# Altium PCB 397881-L.PcbDoc
Units mm, origin at the board's own origin, x right, y up, seen from the top; angles counter-clockwise.
Board outline 90 x 40 mm, 2 copper layers (Top Layer, Bottom Layer); 61 components, 66 nets, 226 pads, 104 vias.
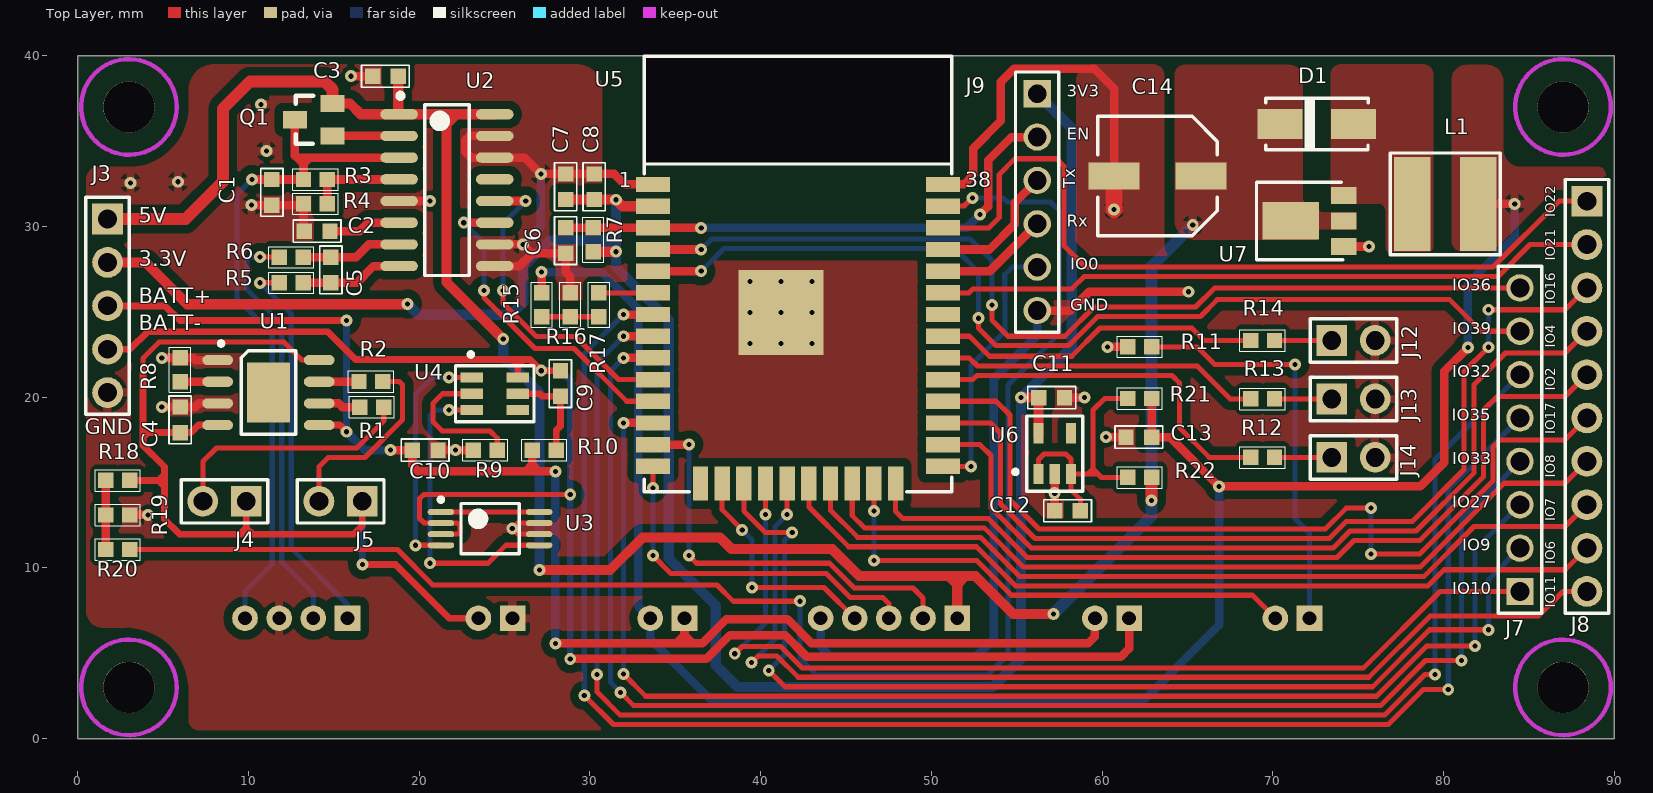
[diagram p0: Top Layer view]
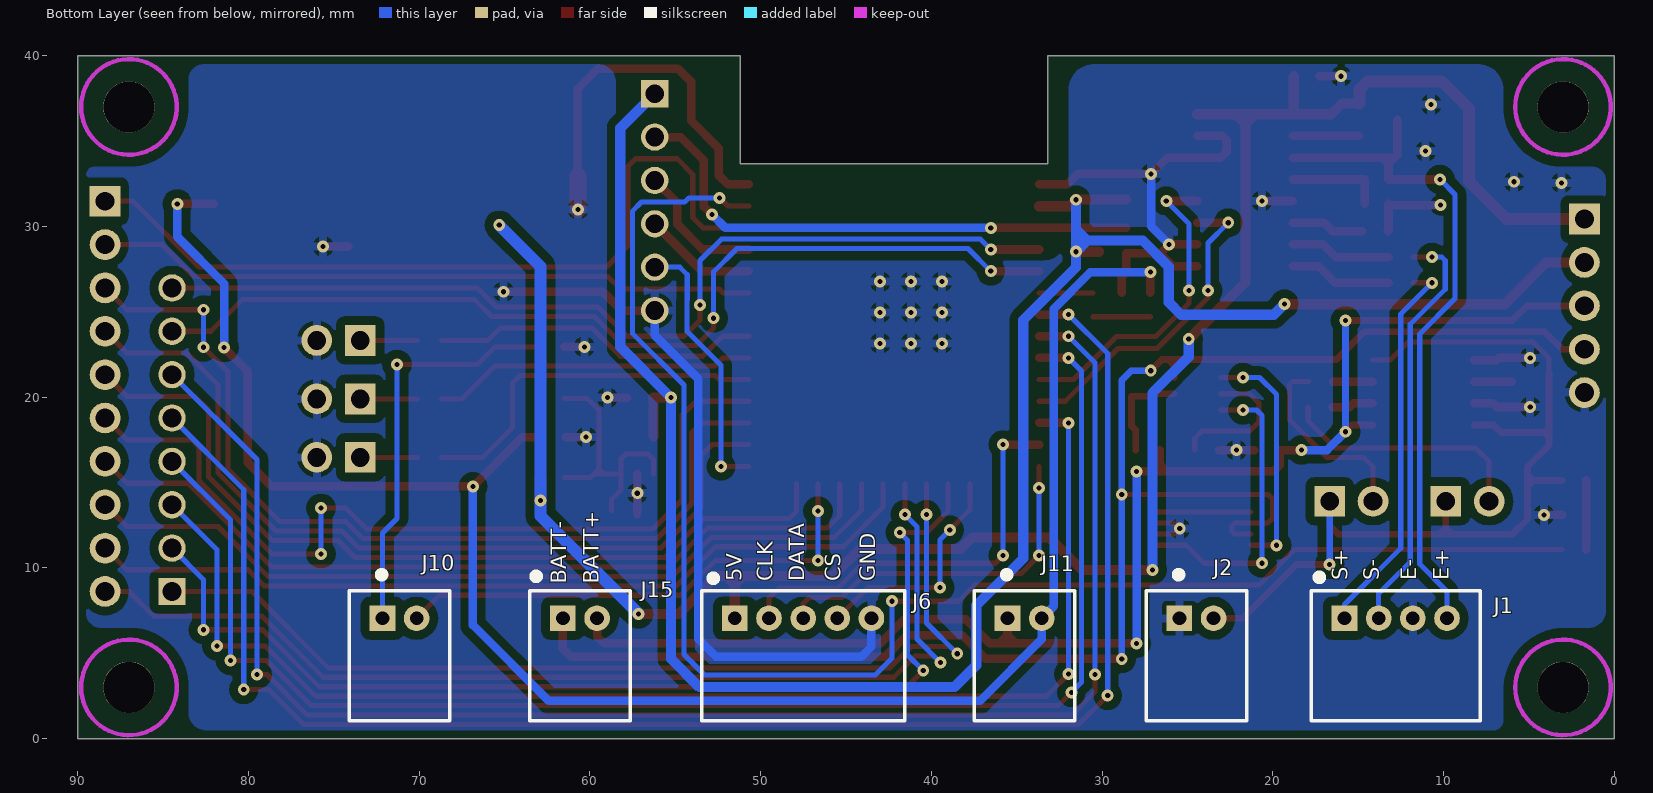
[diagram p1: Bottom Layer view, seen from below]

## Layer stack, top to bottom
Top Solder: solder mask 0.0102, Solder Resist, Dk 3.5
Top Layer: signal copper 0.0356
Dielectric 1: dielectric 0.32, FR-4, Dk 4.8
Bottom Layer: signal copper 0.0356
Bottom Solder: solder mask 0.0102, Solder Resist, Dk 3.5

## Board outline
0,0 0,40 33.19,40 33.19,33.66 51.2,33.66 51.2,40 90,40 90,0

## Design rules (kind name [scope] priority, off if disabled: settings)
Clearance Clearance_1 [All vs InPolygon] p1: gap=0.5 ignorepadtopadclearanceinfootprint=FALSE
Clearance [All] p2: gap=0.254 ignorepadtopadclearanceinfootprint=FALSE
HoleSize [All] p1: absolutevalues=TRUE maxlimit=3 minlimit=0.025 maxpercent=80.000 minpercent=20.000
MinimumSolderMaskSliver [All] p1 off: minsoldermaskwidth=0.254
PolygonConnect [All] p1: thpad.connectstyle=Relief thpad.reliefconductorwidth=0.5 thpad.reliefentries=4 thpad.polygonreliefangle="90 Angle" thpad.airgapwidth=0.254 smdpad.connectstyle=Direct smdpad.reliefconductorwidth=0.254 smdpad.reliefentries=4 smdpad.polygonreliefangle="90 Angle" smdpad.airgapwidth=0.254 via.connectstyle=Relief via.reliefconductorwidth=0.5 via.reliefentries=4 via.polygonreliefangle="90 Angle" via.airgapwidth=0.254
RoutingVias [All] p1: holewidth=0.711 width=1.27 viastyle="Through Hole" minholewidth=0.711 minwidth=1.27 maxholewidth=0.711 maxwidth=1.27
SilkToSolderMaskClearance [IsPad] p1 off: minsilkscreentomaskgap=0.254 clearancetoexposedcopper=TRUE
SolderMaskExpansion [All] p1: expansion=0.102
Width [All] p1: maxlimit=5 minlimit=0.2 preferedwidth=0.3
27 further rules are at their usual default settings.

## Components (designator, comment, footprint, x,y, rotation, side; value= is the part's Value field where it differs from the comment)
C1 "Cap" C0603 11.375,32 r90 top value=10uF
C2 "Cap" C0603 14.025,29.725 r180 top value=0.1uF
C3 "Cap" C0603 18.025,38.8 r0 top value=10uF
C4 "Cap" C0603 5.998,18.675 r270 top value=0.1uF
C5 "Cap" C0603 14.825,27.45 r90 top value=0.1uF
C6 "Cap" C0603 28.575,29.17 r90 top value=1nF
C7 "Cap" C0603 28.575,32.325 r270 top value=0.1uF
C8 "Cap" C0603 30.25,32.325 r270 top value=10uF
C9 "Cap" C0603 28.275,20.8 r270 top value=0.1uF
C10 "Cap" C0603 20.35,16.9 r180 top value=10uF
C11 "Cap" C0603 57.05,19.975 r180 top value=1uF
C12 "Cap" C0603 57.975,13.35 r0 top value=1uF
C13 "Cap" C0603 62.15,17.662 r0 top value=0.1uF
C14 "Cap Pol1" C14 63.25,32.95 r270 top value=100uF
D1 "SS14" D1 72.575,36 r180 top
J1 "Conn_JST_PH4" J1 12.8,7.05 r0 bottom
J2 "Conn_JST_PH" J2,J10,J11,J15 24.47,7.05 r0 bottom
J3 "Conn_01X05_Female_2.54mm" J3 1.75,25.35 r270 top
J4 "LED_Conn_2.54mm" J4,J5,J12,J13,J14 8.6,13.9 r180 top
J5 "LED_Conn_2.54mm" J4,J5,J12,J13,J14 15.4,13.9 r180 top
J6 "Conn_JST_PH" J6 47.51,7.05 r0 bottom
J7 "Conn_01X08_Female_2.54mm" J7 84.475,17.51 r90 top
J8 "Conn_01X10_Female_2.54mm" J8 88.4,20.05 r270 top
J9 "Conn_01X06_Female_2.54mm" J9 56.2,31.425 r270 top
J10 "Conn_JST_PH" J2,J10,J11,J15 71.15,7.05 r0 bottom
J11 "Conn_JST_PH" J2,J10,J11,J15 34.54,7.05 r0 bottom
J12 "LED_Conn_2.54mm" J4,J5,J12,J13,J14 74.725,23.325 r0 top
J13 "LED_Conn_2.54mm" J4,J5,J12,J13,J14 74.725,19.9 r0 top
J14 "LED_Conn_2.54mm" J4,J5,J12,J13,J14 74.725,16.475 r0 top
J15 "Conn_JST_PH" J2,J10,J11,J15 60.58,7.05 r0 bottom
L1 "Inductor Iron" L1 80.1,31.325 r270 top value=47uH
Q1 "S8550" Q1 13.825,36.25 r90 top
R1 "Res1" R0603 17.223,19.419 r0 top value=1K
R2 "Res1" R0603 17.173,20.919 r0 top value=1K
R3 "Res1" R0603 13.925,32.75 r180 top value=20K
R4 "Res1" R0603 13.925,31.325 r0 top value=8.2K
R5 "Res1" R0603 12.5,26.7 r180 top value=100R
R6 "Res1" R0603 12.5,28.2 r180 top value=100R
R7 "Res1" R0603 30.2,29.22 r270 top value=10K
R8 "Res1" R0603 5.998,21.604 r90 top value=1.2K
R9 "Res1" R0603 23.875,16.9 r180 top value=1K
R10 "Res1" R0603 27.325,16.9 r180 top value=100R
R11 "Res1" R0603 62.2,22.95 r0 top value=1K
R12 "Res1" R0603 69.4,16.475 r180 top value=1K
R13 "Res1" R0603 69.4,19.9 r180 top value=1K
R14 "Res1" R0603 69.4,23.32 r180 top value=1K
R15 "Res1" R0603 27.175,25.41 r90 top value=10K
R16 "Res1" R0603 28.85,25.41 r270 top value=20K
R17 "Res1" R0603 30.525,25.41 r270 top value=1K
R18 "Res1" R0603 2.35,15.125 r180 top value=10K
R19 "Res1" R0603 2.35,13.1 r0 top value=20K
R20 "Res1" R0603 2.35,11.075 r180 top value=1K
R21 "Res1" R0603 62.2,19.925 r0 top value=100R
R22 "Res1" R0603 62.2,15.3 r180 top value=100R
U1 "TP4056IC" U1 11.173,20.269 r0 top
U2 "HX711IC" U2 21.625,32.125 r0 top
U3 "FS8205A" U3 24.15,12.3 r0 top
U4 "DW01A" U4 24.425,20.2 r270 top
U5 "ESP-WROOM-32" U5 42.19,23.705 r0 top locked
U6 "AP2112-3.3_LDO" U6 57.225,16.7 r0 top
U7 "BL8530" U7 72.7,30.325 r90 top

## Footprints (in the part's own frame and the unit in brackets; to place one, negate y for a bottom-side part, rotate by r counter-clockwise, add the part's x,y. Pads: shape width x height; smd on the part's side, far side on the other; paste and mask are expansions set on the pad)
C14 [mm]
  rect 1.6x3 smd: 1(0,2.55) 2(0,-2.55)
  silkscreen extent -3.5,-3.5 3.5,3.5, body extent -3.3,-3.6 3.3,3.6, height 5.9
C0603 [mm]
  rect 0.9x0.9 smd: 1(-0.75,0) 2(0.75,0)
  silkscreen extent -1.4,-0.65 1.4,0.65, body extent -0.8,-0.4 0.8,0.4, height 0.3
D1 [mm]
  rect 2.65x1.75 smd: 1(-2.15,0) 2(2.15,0)
  silkscreen extent -3.02,-1.5 3,1.5, body extent -2.75,-1.4 2.75,1.4, height 2.6
J1 [mm]
  rect 1.5x1.5 hole 0.8: 1(3,0)
  round 1.5 hole 0.8: 2(1,0) 3(-1,0) 4(-3,0)
  silkscreen extent -4.95,-2.6 4.95,6
J2,J10,J11,J15 [mm]
  rect 1.5x1.5 hole 0.8: 1(1,0)
  round 1.5 hole 0.8: 2(-1,0)
  silkscreen extent -2.95,-2.75 2.95,6
J3 [mm]
  rect 1.8x1.8 hole 1.1: 1(-5.08,0)
  round 1.8 hole 1.1: 2(-2.54,0) 3(0,0) 4(2.54,0) 5(5.08,0)
  silkscreen extent -6.35,-1.27 6.35,1.27, body extent -6.35,-1.27 6.35,1.27, height 9.07
J4,J5,J12,J13,J14 [mm]
  rect 1.8x1.8 hole 1.1: 1(-1.27,0)
  round 1.8 hole 1.1: 2(1.27,0)
  silkscreen extent -2.54,-1.27 2.54,1.27, body extent -2.54,-1.27 2.54,1.27, height 9.07
J6 [mm]
  rect 1.5x1.5 hole 0.8: 1(4,0)
  round 1.5 hole 0.8: 2(2,0) 3(0,0) 4(-2,0) 5(-4,0)
  silkscreen extent -5.95,-2.54 5.95,6
J7 [mm]
  rect 1.6x1.6 hole 1.1: 1(-8.89,0)
  round 1.6 hole 1.1: 2(-6.35,0) 3(-3.81,0) 4(-1.27,0) 5(1.27,0) 6(3.81,0) 7(6.35,0) 8(8.89,0)
  silkscreen extent -10.16,-1.27 10.16,1.27, body extent -10.16,-1.27 10.16,1.27, height 9.07
J8 [mm] "Connector; Header; 9 Position"
  rect 1.8x1.8 hole 1.1: 1(-11.43,0)
  round 1.8 hole 1.1: 2(-8.89,0) 3(-6.35,0) 4(-3.81,0) 5(-1.27,0) 6(1.27,0) 7(3.81,0) 8(6.35,0) 9(8.89,0) 10(11.43,0)
  silkscreen extent -12.7,-1.27 12.7,1.27, body extent -12.7,-1.27 12.7,1.27, height 9.07
J9 [mm]
  rect 1.6x1.6 hole 1.1: 1(-6.35,0)
  round 1.6 hole 1.1: 2(-3.81,0) 3(-1.27,0) 4(1.27,0) 5(3.81,0) 6(6.35,0)
  silkscreen extent -7.62,-1.27 7.62,1.27, body extent -7.62,-1.27 7.62,1.27, height 9.07
L1 [mm]
  rect 5.5x2.15 smd: 1(0,1.925) 2(0,-1.925)
  silkscreen extent -2.98,-3.22 2.98,3.22
Q1 [mm]
  rect 1x1.4 smd: 1(-0.95,-1.1) 2(0.95,-1.1) 3(0,1.1)
  silkscreen extent -1.4,0.04 1.4,1.06, body extent -1.5,-1.25 1.5,1.25, height 1.55
R0603 [mm] "R0603"
  rect 0.9x0.9 smd: 1(-0.7,0) 2(0.7,0)
  silkscreen extent -1.33,-0.63 1.33,0.63, body extent -0.85,-0.4 0.85,0.4, height 0.56
U1 [mm]
  oval 1.8x0.6 smd: 1(-2.972,1.905) 2(-2.972,0.635) 3(-2.972,-0.635) 4(-2.972,-1.905) 5(2.972,-1.905) 6(2.972,-0.635) 7(2.972,0.635) 8(2.972,1.905)
  rect 2.5x3.5 smd: 9(0.002,0.006)
  silkscreen extent -2.9,-2.44 1.6,3, body extent -2.99,-2.45 3,2.45, height 1.7
U2 [mm]
  rrect100% 2.2x0.6 smd: 1(-2.8,4.445) 2(-2.8,3.175) 3(-2.8,1.905) 4(-2.8,0.635) 5(-2.8,-0.635) 6(-2.8,-1.905) 7(-2.8,-3.175) 8(-2.8,-4.445) 9(2.8,-4.445) 10(2.8,-3.175) 11(2.8,-1.905) 12(2.8,-0.635) 13(2.8,0.635) 14(2.8,1.905) 15(2.8,3.175) 16(2.8,4.445)
  silkscreen extent -2.87,-5 1.3,5.67, body extent -3.07,-4.98 3.07,4.99, height 1.88
U3 [mm] "TSOP, 14-Leads, Body 5.1x4.5mm (max), Pitch 0.65mm, IPC Medium Density"
  oval 1.55x0.35 smd: 1(-2.875,0.975) 2(-2.875,0.325) 3(-2.875,-0.325) 4(-2.875,-0.975) 5(2.875,-0.975) 6(2.875,-0.325) 7(2.875,0.325) 8(2.875,0.975)
  silkscreen extent -3,-1.47 1.7,1.82
U4 [mm] "SOT-23/SC-74A; 5 Leads; Body 3 x 3 mm, inc. leads (LxW max)"
  rect 0.6x1.3 smd: 1(-0.95,-1.35) 2(0,-1.35) 3(0.95,-1.35) 4(0.95,1.35) 5(0,1.35) 6(-0.95,1.35)
  silkscreen extent -2.42,-2.3 1.65,2.3, body extent -1.5,-1.5 1.5,1.5, height 1.3
U5 [mm]
  rect 2x0.9 smd: 1(-8.5,8.755) 2(-8.5,7.485) 3(-8.5,6.215) 4(-8.5,4.945) 5(-8.5,3.675) 6(-8.5,2.405) 7(-8.5,1.135) 8(-8.5,-0.135) 9(-8.5,-1.405) 10(-8.5,-2.675) 11(-8.5,-3.945) 12(-8.5,-5.215) 13(-8.5,-6.485) 14(-8.5,-7.755) 25(8.5,-7.755) 26(8.5,-6.485) 27(8.5,-5.215) 28(8.5,-3.945) 29(8.5,-2.675) 30(8.5,-1.405) 31(8.5,-0.135) 32(8.5,1.135) 33(8.5,2.405) 34(8.5,3.675) 35(8.5,4.945) 36(8.5,6.215) 37(8.5,7.485) 38(8.5,8.755)
  rect 0.9x2 smd: 15(-5.715,-8.755) 16(-4.445,-8.755) 17(-3.175,-8.755) 18(-1.905,-8.755) 19(-0.635,-8.755) 20(0.635,-8.755) 21(1.905,-8.755) 22(3.175,-8.755) 23(4.445,-8.755) 24(5.715,-8.755)
  rect 5x5 smd: 39(-1,1.255)
  silkscreen extent -9,-9.24 9,16.26, body extent -9.06,-9.29 9.01,16.25, height 3.2
U6 [mm] "SOT-23/SC-74A; 5 Leads; Body 3 x 3 mm, inc. leads (LxW max)"
  rect 0.6x1.2 smd: 1(-0.95,-1.2) 2(0,-1.2) 3(0.95,-1.2) 4(0.95,1.2) 5(-0.95,1.2)
  silkscreen extent -2.42,-2.2 1.65,2.2, body extent -1.5,-1.25 1.5,1.25, height 1.15
U7 [mm]
  rect 1x1.5 smd: 1(-1.5,-1.45) 2(0,-1.45) 3(1.5,-1.45)
  rect 2.2x3.3 smd: 2(0,1.65)
  silkscreen extent -2.27,-1.4 2.27,3.66, body extent -2.34,-1.66 2.26,2.59, height 1.79

## Part data
C1 C2 C3 C4 C5 C6 C7 C8 C9 C10 C11 C12 C13: "Capacitor", LatestRevisionDate=17-Jul-2002, LatestRevisionNote="Re-released for DXP Platform.", PackageDescription="Radial Cap, Thru-Hole; 2 Leads; 0.3 in Pin Spacing", PackageReference=RAD-0.3, Published=8-Jun-2000, Publisher="Altium Limited"
C14: "Polarized Capacitor (Radial)", LatestRevisionDate=17-Jul-2002, LatestRevisionNote="Re-released for DXP Platform.", PackageDescription="Polarized Capacitor (Radial); 2 Leads", PackageReference=RB7.6-15, Published=8-Jun-2000, Publisher="Altium Limited"
D1: library part "D Schottky", "Schottky Diode", Code_JEDEC=DO-214-AA, LatestRevisionDate=17-Jul-2002, LatestRevisionNote="Re-released for DXP Platform.", PackageDescription="DO-214-AA/SMB; 2 C-Bend Leads; Body 5.3 x 3.6 mm, inc. leads (LxW)", PackageReference=SMB, Published=8-Jun-2000, Publisher="Altium Limited"
J1 J6: "Header, 5-Pin", LatestRevisionDate=17-Jul-2002, LatestRevisionNote="Re-released for DXP Platform.", Publisher="Altium Limited"
J2 J4 J5 J10 J11 J12 J13 J14 J15: library part "Header 2", "Header, 2-Pin", LatestRevisionDate=17-Jul-2002, LatestRevisionNote="Re-released for DXP Platform.", Publisher="Altium Limited"
J3 J7 J8 J9: "Header, 6-Pin", LatestRevisionDate=17-Jul-2002, LatestRevisionNote="Re-released for DXP Platform.", Publisher="Altium Limited"
L1: "Magnetic-Core Inductor", LatestRevisionDate=17-Jul-2002, LatestRevisionNote="Re-released for DXP Platform.", PackageDescription="Axial Device, Thru-Hole; 2 Leads; 0.9 in Pin Spacing", PackageReference=AXIAL-0.9, Published=24-Mar-1999, Publisher="Altium Limited"
Q1: library part PNP, "PNP Bipolar Transistor", LatestRevisionDate=29-May-2009, LatestRevisionNote="IPC-7351 Footprint Added.", PackageDescription="3-Pin SOT-23 Package 0.95 mm Pitch, 2.4 mm Lead Span", PackageReference=SOT-23B, PackageVersion=Aug-1999, Published=8-Jun-2000, Publisher="Altium Limited"
R1 R2 R3 R4 R5 R6 R7 R8 R9 R10 R11 R12 R13 R14 R15 R16 R17 R18 R19 R20 R21 R22: "Resistor", LatestRevisionDate=17-Jul-2002, LatestRevisionNote="Re-released for DXP Platform.", PackageDescription="Axial Device, Thru-Hole; 2 Leads; 0.3 in Pin Spacing", PackageReference=AXIAL-0.3, Published=8-Jun-2000, Publisher="Altium Limited"

## Free pads (board coordinates)
  round 3 hole 3 unplated: ""(3,3) ""(3,37) ""(87,3) ""(87,37)

## Via types
v1: diameter 0.7, hole 0.3, Top Layer to Bottom Layer, 104 vias

## Nets (pads, with @x,y where several pads share a name; then routed paths per layer and width w, separated by ;. In a path a pad name is that pad's centre, name@x,y a point inside that pad or via, vN(x,y) a via of type N, cw(c..) or ccw(c..) an arc to the next point about the centre after c; other vN are vias at no path point)
3.3V: C7.2 C8.2 C11.2 J3.2 J9.1 R7.2 U5.2 U6.5 | length 129.2
  Top Layer w0.6: J3.2 3.982,27.89 6.422,25.45 v1(19.325,25.45) ; C7.2 C8.2 31.52,31.575 v1(31.53,31.565) 31.905,31.19 U5.2 ; R7.2 v1(31.53,28.52) ; v1(55.25,19.975) C11.2 56.275,19.95 U6.5 U6.5@56.275,17.7
  Bottom Layer w0.6: v1(19.325,25.45) 19.95,24.825 25.375,24.825 26.1,25.55 26.1,27.65 27.625,29.175 30.855,29.175 ; v1(31.53,31.565) 31.53,29.85 ; J9.1 58.22,35.755 58.22,22.945 v1(55.25,19.975) 55.25,4.681 53.586,3.017 38.663,3.017 37.375,4.305 37.375,7.8 34.625,10.55 34.625,24.52 31.53,27.615 v1@31.53,28.5 ; 30.855,29.175 v1@31.53,28.5 ; 30.855,29.175 31.53,29.85 ; v1@31.53,28.5 v1(31.53,28.52) 31.53,29.85
+5V: C3.2 C14.1 D1.2 J3.1 J6.1 Q1.2 R22.1 U2.1 U2.16 U7.2 | length 125.7
  Top Layer w0.6: Q1.2 15.95,37.2 16.58,36.57 U2.1 ; C3.2 18.775,36.62 U2.1 ; U2.16 22.175,36.57 ; v1(24.925,23.4) 21.6,26.725 21.6,35.995 ; v1(27.05,9.875) 31.179,9.875 33.079,11.775 37.625,11.775 38.3,11.1 44.2,11.1 45.775,9.525 51.02,9.525 ; J6.1 51.51,9.035 ; v1(57.15,7.3) 54.8,7.3 52.575,9.525 52,9.525 ; U2.1 21.025,36.57 ; 21.025,36.57 22.175,36.57 ; 21.025,36.57 21.6,35.995 ; 21.6,35.995 22.175,36.57 ; 51.02,9.525 51.51,9.035 ; 51.02,9.525 52,9.525 ; 51.51,9.035 52,9.525
  Top Layer w0.7: J3.1 6.305,30.43 8.5,32.625 8.5,36.894 10.106,38.5 14.45,38.5 14.925,38.025 Q1.2 ; v1(62.9,13.95) R22.1
  Bottom Layer w0.6: v1(24.925,23.4) 24.925,22.375 27.05,20.25 v1(27.05,9.875)
  Bottom Layer w0.7: v1(57.15,7.3) 62.9,13.05 v1(62.9,13.95) 62.9,27.666 v1(65.309,30.075)
+BATT: C10.2 J3.3 J11.1 J15.2 R10.2 U1.5 | length 84.7
  Top Layer w0.4: J3.3 5.125,25.35 5.992,24.483 v1(15.75,24.483) ; U1.5 15.361,18.364 v1(15.75,17.975)
  Top Layer w0.5: v1(18.325,16.9) C10.2 19.6,16 19.95,15.65 26.225,15.65 ; R10.2 26.625,16.05 ; v1(27.975,5.575) 35.05,5.575 ; v1(27.975,15.65) 27.025,15.65 ; J11.1 35.54,6.065 ; J15.2 59.58,5.98 59.2,5.6 42.965,5.6 41.565,7 38,7 36.575,5.575 36.03,5.575 ; 26.225,15.65 27.025,15.65 ; 26.225,15.65 26.625,16.05 ; 26.625,16.05 27.025,15.65 ; 35.05,5.575 36.03,5.575 ; 35.05,5.575 35.54,6.065 ; 35.54,6.065 36.03,5.575
  Bottom Layer w0.4: v1(15.75,17.975) v1(15.75,24.483)
  Bottom Layer w0.5: v1(15.75,17.975) 16.825,16.9 v1(18.325,16.9) ; v1(27.975,5.575) v1@27.975,15.55
-BATT: C9.1 J3.4 J15.1 U3.2 U3.3 U4.6 | length 97.8
  Top Layer w0.3: U3.3 22.255,11.975 22.4,12.12 22.4,12.45 22.225,12.625 U3.2 20.3,12.625 20.025,12.9 20.025,14.05 20.275,14.3 v1(28.85,14.3)
  Top Layer w0.4: J3.4 3.06,22.81 4.079,23.829 14.646,23.829 16.275,22.2 25.425,22.2 ; U4.6 25.775,21.85 ; C9.1 v1(27.15,21.55) 26.5,22.2 26.125,22.2 ; 25.425,22.2 26.125,22.2 ; 25.425,22.2 25.775,21.85 ; 25.775,21.85 26.125,22.2
  Top Layer w0.5: v1(28.85,4.675) 36.82,4.675 38.21,6.065 41.434,6.065 42.699,4.8 61.1,4.8 61.58,5.28 J15.1
  Bottom Layer w0.4: v1(27.15,21.55) 28.275,21.55 28.85,20.975 v1(28.85,14.3) v1(28.85,4.675)
DISP_CLK: J6.2 U5.13 | length 24.5
  Top Layer w0.3: v1(35.8,10.725) 36.25,10.275 44.029,10.275 45.483,8.821 48.929,8.821 49.51,8.24 J6.2
  Top Layer w0.5: U5.13 v1(35.8,17.22)
  Bottom Layer w0.3: v1(35.8,10.725) v1(35.8,17.22)
DISP_CS: J6.4 U5.16 | length 13.6
  Top Layer w0.3: U5.16 37.745,13.4 v1(38.92,12.225) ; v1(39.5,8.85) 43.71,8.85 J6.4
  Bottom Layer w0.3: v1(38.92,12.225) 39.5,11.645 v1(39.5,8.85)
DISP_DATA: J6.3 U5.14 | length 21.1
  Top Layer w0.3: v1(33.69,10.725) 34.74,9.675 43.846,9.675 45.254,8.267 47.158,8.267 47.51,7.915 J6.3 ; v1(33.69,14.675) U5.14
  Bottom Layer w0.3: v1(33.69,10.725) v1(33.69,14.675)
EN: C6.2 J9.2 R7.1 U5.3 | length 31.4
  Top Layer w0.5: C6.2 R7.1 U5.3 v1(36.52,29.92) ; v1(52.855,30.7) 53.321,31.166 53.321,33.871 54.685,35.235 J9.2
  Bottom Layer w0.5: v1(36.52,29.92) 52.075,29.92 v1(52.855,30.7)
GND: C1.1 C2.2 C3.1 C4.1 C6.1 C7.1 C8.1 C10.1 C11.1 C12.1 C13.1 C14.2 J1.3 J2.1 J3.5 J6.5 J9.6 J12.2 J13.2 J14.2 R4.1 R8.2 R9.2 R11.1 R16.1 R19.2 U1.1 U1.3 U2.5 U2.9 U2.10 U2.14 U2.15 U3.6 U3.7 U5.1 U5.38 U5.39 U6.2 U7.1 | length 121
  Top Layer w0.3: U3.6 25.775,11.975 v1(25.45,12.3) 25.775,12.625 U3.7
  Top Layer w0.5: R19.2 v1(4.123,13.1) ; v1(4.925,19.425) C4.1 6.875,19.425 7.084,19.634 U1.3 ; v1(4.925,22.304) R8.2 6.77,22.304 6.899,22.175 8.2,22.175 U1.1 ; v1(10.175,31.25) C1.1 13.15,31.25 R4.1 13.225,29.775 C2.2 ; v1(16,38.8) C3.1 ; U2.5 v1(20.64,31.49) ; C10.1 v1(22.138,16.9) R9.2 ; U2.9 25.86,27.68 26.6,28.42 ; U2.10 v1(26.07,28.95) 26.6,28.42 ; U2.15 22.95,35.3 22.7,35.05 22.7,34.375 23.045,34.03 U2.14 26.17,34.03 v1(27.125,33.075) C7.1 C8.1 31.425,33.075 32.04,32.46 U5.1 ; R16.1 28.85,27.075 28.575,27.35 C6.1 26.6,28.42 ; U5.38 51.91,32.46 52.45,33 52.45,34.575 54.075,36.2 54.075,38.475 54.85,39.25 59.525,39.25 60.7,38.075 C14.2 ; J9.6 58.15,25.075 59.25,26.175 v1(65.059,26.175) ; C12.1 v1(57.225,14.375) U6.2 ; C11.1 v1(58.975,19.975) ; v1(60.225,17.662) C13.1 ; v1(60.325,22.95) R11.1 ; U7.1 v1(75.625,28.825)
  Top Layer w1: v1(60.7,31) C14.2
  Bottom Layer w0.5: v1(26.07,28.95) 27.125,30.005 v1(27.125,33.075) ; J6.5 43.51,5.39 44.1,4.8 52.613,4.8 53.65,5.837 53.65,21.075 56.2,23.625 J9.6
  other v1: 39.38,23.15 41.19,23.15 43,23.15 39.38,24.96 41.19,24.96 43,24.96 39.38,26.77 41.19,26.77 43,26.77 3.089,32.551 5.868,32.619 11.047,34.411 10.725,37.141
IN_CHRG: R20.1 U5.37 | length 91.5
  Top Layer w0.3: R20.1 18.723,11.075 20.798,9 37.45,9 38.4,8.05 v1(42.3,8.05) ; U5.37 51.915,31.19 v1(52.4,31.675)
  Bottom Layer w0.3: v1(42.3,8.05) 42.3,4.709 43.288,3.721 53.294,3.721 54.496,4.923 54.496,20.721 57.516,23.741 57.516,30.884 56.975,31.425 54.45,31.425 54.2,31.675 v1(52.4,31.675)
MON: R17.1 U5.6 | length 3.2
  Top Layer w0.3: R17.1 U5.6
NetC1_2: C1.2 J1.4 Q1.3 R3.2 U2.3 | length 40.8
  Top Layer w0.5: v1(10.2,32.75) C1.2 R3.2 13.225,33.655 ; Q1.3 12.725,34.155 12.85,34.03 ; U2.3 13.6,34.03 ; 12.85,34.03 13.6,34.03 ; 12.85,34.03 13.225,33.655 ; 13.225,33.655 13.6,34.03
  Bottom Layer w0.3: J1.4 9.8,8.625 11.396,10.221 11.396,23.704 9.325,25.775 9.325,31.875 v1(10.2,32.75)
NetC2_1: C2.1 U2.6 | length 4.3
  Top Layer w0.5: C2.1 16.505,29.725 17,30.22 U2.6
NetC4_2: C4.2 J2.2 J4.1 J5.1 R18.1 U1.4 U1.8 | length 56.9
  Top Layer w0.3: 3.825,21.4 3.825,22.275 4.775,23.225 12.073,23.225 13.124,22.174 U1.8
  Top Layer w0.4: R18.1 4.725,15.125 ; 3.825,21.4 3.825,18.225 ; U1.4 7.064,18.364 6.625,17.925 C4.2 4.125,17.925 ; J4.1 9.87,12.345 ; v1(16.67,10.2) 18.625,10.2 21.775,7.05 J2.2 ; J5.1 16.67,12.475 16.17,11.975 10.24,11.975 ; 3.825,17.625 3.825,17.175 5.075,15.925 5.075,15.475 ; 3.825,17.625 3.825,18.225 ; 3.825,17.625 4.125,17.925 ; 3.825,18.225 4.125,17.925 ; 4.725,15.125 5.075,14.775 ; 4.725,15.125 5.075,15.475 ; 5.075,14.775 5.075,12.85 5.95,11.975 9.5,11.975 ; 5.075,14.775 5.075,15.475 ; 9.5,11.975 10.24,11.975 ; 9.5,11.975 9.87,12.345 ; 9.87,12.345 10.24,11.975
  Bottom Layer w0.4: v1(16.67,10.2) J5.1
NetC5_1: C5.1 R5.1 U2.8 | length 6
  Top Layer w0.5: R5.1 C5.1 16.35,26.7 17.33,27.68 U2.8
NetC5_2: C5.2 R6.1 U2.7 | length 5.9
  Top Layer w0.5: R6.1 C5.2 16.3,28.2 17.05,28.95 U2.7
NetC9_2: C9.2 R10.1 U4.5 | length 5.8
  Top Layer w0.4: U4.5 27.075,20.2 27.225,20.05 C9.2 28.275,18.3 28.025,18.05 R10.1
NetC12_2: C12.2 R21.1 R22.2 U6.1 U6.3 | length 16.3
  Top Layer w0.3: U6.1 56.275,16.35 56.6,16.675 57.875,16.675 58.175,16.375 U6.3 ; C12.2 58.725,14.025 58.175,14.575 U6.3 ; R22.2 59.967,15.3 59.767,15.5 ; R21.1 60.15,19.925 59.471,19.246 59.471,15.796 ; U6.3 59.175,15.5 ; 59.175,15.5 59.767,15.5 ; 59.175,15.5 59.471,15.796 ; 59.471,15.796 59.767,15.5
NetD1_1: D1.1 L1.2 U7.3
NetJ1_1: J1.1 R5.2 | length 22.9
  Top Layer w0.3: v1(10.675,26.7) R5.2
  Bottom Layer w0.3: v1(10.675,26.7) 12.504,24.871 12.504,11.146 15.8,7.85 J1.1
NetJ1_2: J1.2 R6.2 | length 24.5
  Top Layer w0.3: v1(10.675,28.2) R6.2
  Bottom Layer w0.3: v1(10.675,28.2) 10.1,28.2 9.9,28 9.9,26.325 11.95,24.275 11.95,10.35 13.8,8.5 J1.2
NetJ4_2: J4.2 R1.2 | length 14.7
  Top Layer w0.3: J4.2 7.33,16.23 8.125,17.025 16.35,17.025 17.923,18.598 R1.2
NetJ5_2: J5.2 R2.2 | length 11.3
  Top Layer w0.3: J5.2 14.13,15.93 14.671,16.471 16.821,16.471 19.025,18.675 19.025,20.725 18.831,20.919 R2.2
NetJ7_1: J7.1 U5.18 | length 59.3
  Top Layer w0.3: v1(38.485,4.975) 38.91,5.4 41.174,5.4 42.428,4.146 75.321,4.146 79.795,8.62 J7.1 ; v1(40.285,13.125) U5.18
  Bottom Layer w0.3: v1(38.485,4.975) 40.285,6.775 v1(40.285,13.125)
NetJ7_2: J7.2 U5.17 | length 63.1
  Top Layer w0.3: U5.17 39.015,13.329 40.269,12.075 v1(41.85,12.075) ; v1(40.475,3.988) 41.425,3.038 75.846,3.038 79.183,6.375 v1(82.625,6.375)
  Bottom Layer w0.3: v1(40.475,3.988) 41.393,4.906 41.393,11.618 v1(41.85,12.075) ; v1(82.625,6.375) 82.625,9.31 J7.2
NetJ7_3: J7.3 U5.12 | length 77.4
  Top Layer w0.3: v1(31.96,3.79) 33.266,2.484 76.076,2.484 79.017,5.425 v1(81.85,5.425)
  Top Layer w0.5: v1(31.96,18.49) U5.12
  Bottom Layer w0.3: v1(31.96,3.79) v1(31.96,18.49) ; v1(81.85,5.425) 81.85,11.075 J7.3
NetJ7_4: J7.4 U5.9 | length 85.6
  Top Layer w0.3: v1(31.8,2.7) 32.57,1.93 76.305,1.93 78.95,4.575 v1(81.05,4.575)
  Top Layer w0.5: v1(31.96,22.3) U5.9
  Bottom Layer w0.3: v1(31.8,2.7) 31.2,3.3 31.2,21.54 v1(31.96,22.3) ; v1(81.05,4.575) 81.05,12.815 J7.4
NetJ7_5: J7.5 U5.7 | length 94.8
  Top Layer w0.3: v1(29.671,2.529) 31.378,0.822 76.764,0.822 78.817,2.875 v1(80.275,2.875)
  Top Layer w0.5: v1(31.96,24.84) U5.7
  Bottom Layer w0.3: v1(29.671,2.529) 29.671,22.551 v1(31.96,24.84) ; v1(80.275,2.875) 80.275,14.58 J7.5
NetJ7_6: J7.6 U5.8 | length 93.5
  Top Layer w0.3: v1(30.425,3.75) 30.425,2.725 31.774,1.376 76.535,1.376 78.909,3.75 v1(79.5,3.75)
  Top Layer w0.5: v1(31.96,23.57) U5.8
  Bottom Layer w0.3: v1(30.425,3.75) 30.425,22.035 v1(31.96,23.57) ; v1(79.5,3.75) 79.5,16.345 J7.6
NetJ7_7: J7.7 U5.5 | length 57.5
  Top Layer w0.3: v1(52.75,24.625) 52.75,24.05 53.784,23.016 58.039,23.016 59.748,24.725 65.757,24.725 66.744,25.712 80.358,25.712 82.21,23.86 J7.7
  Top Layer w0.5: U5.5 v1(36.52,27.38)
  Bottom Layer w0.3: v1(36.52,27.38) 37.852,28.712 51.388,28.712 52.75,27.35 v1(52.75,24.625)
NetJ7_8: J7.8 U5.4 | length 56.6
  Top Layer w0.3: v1(53.55,25.4) 53.55,24.51 54.49,23.57 57.81,23.57 59.519,25.279 65.478,25.279 66.599,26.4 J7.8
  Top Layer w0.5: U5.4 v1(36.52,28.65)
  Bottom Layer w0.3: v1(36.52,28.65) 37.136,29.266 52.284,29.266 53.55,28 v1(53.55,25.4)
NetJ8_1: J8.1 U5.36 | length 47.8
  Top Layer w0.3: U5.36 53.37,29.92 53.975,30.525 53.975,33.05 54.89,33.965 57.335,33.965 57.775,33.525 57.775,28.875 59.021,27.629 82.904,27.629 86.755,31.48 J8.1
NetJ8_2: J8.2 U5.33 | length 38.9
  Top Layer w0.3: U5.33 52.2,26.11 52.435,26.345 58.22,26.345 58.95,27.075 83.2,27.075 85.065,28.94 J8.2
NetJ8_3: J8.3 U5.27 | length 53.7
  Top Layer w0.3: U5.27 53.46,18.49 54.046,17.904 54.046,13.751 56.076,11.721 73.304,11.721 74.291,12.708 78.149,12.708 81.2,15.759 81.2,21.5 v1(82.625,22.925) ; v1(82.625,25.12) 87.12,25.12 J8.3
  Bottom Layer w0.3: v1(82.625,22.925) v1(82.625,25.12)
NetJ8_4: J8.4 U5.26 | length 50.3
  Top Layer w0.3: U5.26 52.855,17.22 53.492,16.583 53.492,13.521 55.846,11.167 73.534,11.167 74.521,12.154 78.379,12.154 81.792,15.567 81.792,20.742 83.63,22.58 87.12,22.58 J8.4
NetJ8_5: J8.5 U5.24 | length 50
  Top Layer w0.3: U5.24 47.905,13.32 48.325,12.9 53.33,12.9 55.617,10.613 73.763,10.613 74.75,11.6 78.608,11.6 82.346,15.338 82.346,19.246 83.14,20.04 87.12,20.04 J8.5
NetJ8_6: J8.6 U5.28 | length 51.4
  Top Layer w0.3: U5.28 53.79,19.76 54.6,18.95 54.6,13.98 56.305,12.275 73.075,12.275 74.3,13.5 v1(75.75,13.5) ; v1(75.75,10.825) 78.617,10.825 82.9,15.108 82.9,17.075 83.325,17.5 87.12,17.5 J8.6
  Bottom Layer w0.3: v1(75.75,10.825) v1(75.75,13.5)
NetJ8_7: J8.7 U5.22 | length 48.7
  Top Layer w0.3: U5.22 45.365,13.06 46.079,12.346 53.1,12.346 55.387,10.059 78.634,10.059 83.535,14.96 87.12,14.96 J8.7
NetJ8_8: J8.8 U5.21 | length 49.2
  Top Layer w0.3: U5.21 44.095,13.38 45.683,11.792 52.871,11.792 55.158,9.505 78.863,9.505 81.778,12.42 87.12,12.42 J8.8
NetJ8_9: J8.9 U5.20 | length 49.8
  Top Layer w0.3: U5.20 42.825,13.575 45.162,11.238 52.641,11.238 54.928,8.951 79.093,8.951 80.032,9.89 87.13,9.89 J8.9
NetJ8_10: J8.10 U5.19 | length 63
  Top Layer w0.3: v1(39.475,4.467) 39.854,4.846 40.944,4.846 42.198,3.592 75.617,3.592 79.2,7.175 85.55,7.175 86.995,8.62 J8.10 ; v1(41.555,13.125) U5.19
  Bottom Layer w0.3: v1(39.475,4.467) 40.839,5.831 40.839,12.409 v1(41.555,13.125)
NetJ9_3: J9.3 U5.35 | length 7.9
  Top Layer w0.5: U5.35 53.4,28.65 54.875,30.125 54.875,31.37 J9.3
NetJ9_4: J9.4 U5.34 | length 6.7
  Top Layer w0.5: U5.34 53.425,27.38 J9.4
NetJ9_5: J9.5 U5.25 | length 15.8
  Top Layer w0.3: U5.25 v1(52.325,15.95)
  Bottom Layer w0.3: v1(52.325,15.95) 52.325,21.875 54.304,23.854 54.304,25.712 54.301,25.716 54.301,27.176 54.74,27.615 J9.5
NetJ10_1: J10.1 R11.2 | length 24.1
  Top Layer w0.3: R11.2 65.567,22.95 66.592,21.925 v1(71.3,21.925)
  Bottom Layer w0.3: v1(71.3,21.925) 71.3,12.9 72.15,12.05 J10.1
NetJ10_2: J10.2 U5.23 | length 29.4
  Top Layer w0.3: v1(46.635,10.44) 52.656,10.44 54.699,8.397 68.803,8.397 J10.2 ; v1(46.635,13.34) U5.23
  Bottom Layer w0.3: v1(46.635,10.44) v1(46.635,13.34)
NetJ12_1: J12.1 R14.1 | length 3.4
  Top Layer w0.3: R14.1 70.105,23.325 J12.1
NetJ13_1: J13.1 R13.1 | length 3.4
  Top Layer w0.3: R13.1 J13.1
NetJ14_1: J14.1 R12.1 | length 3.4
  Top Layer w0.3: R12.1 J14.1
NetQ1_1: Q1.1 U2.2 | length 3.9
  Top Layer w0.5: Q1.1 U2.2
NetR1_1: R1.1 U1.6 | length 2.5
  Top Layer w0.5: U1.6 15.291,19.634 15.506,19.419 R1.1
NetR2_1: R2.1 U1.7 | length 2.3
  Top Layer w0.5: U1.7 16.458,20.904 R2.1
NetR3_1: R3.1 R4.2 U2.4 | length 5.6
  Top Layer w0.5: R4.2 R3.1 18.815,32.75 U2.4
NetR8_1: R8.1 U1.2 | length 2.2
  Top Layer w0.5: R8.1 U1.2
NetR9_1: R9.1 U4.2 | length 8.4
  Top Layer w0.3: U4.2 21.37,20.2 20.8,19.63 20.8,18.575 21.35,18.025 24.15,18.025 24.575,17.6 R9.1
NetR12_2: R12.2 U5.29 | length 21.6
  Top Layer w0.3: U5.29 52.43,21.03 52.671,21.271 64.1,21.271 64.524,20.847 64.524,18.226 66.275,16.475 R12.2
NetR13_2: R13.2 U5.30 | length 19
  Top Layer w0.3: U5.30 52.225,22.3 52.7,21.825 65.575,21.825 67.5,19.9 R13.2
NetR14_2: R14.2 U5.31 | length 19.5
  Top Layer w0.3: U5.31 52.23,23.57 53.4,22.4 58.221,22.4 59.871,24.05 65.25,24.05 65.98,23.32 R14.2
NetR15_1: R15.1 R16.2 R17.2 | length 3.4
  Top Layer w0.3: R15.1 R16.2 R17.2
NetR18_2: R18.2 R19.1 R20.2 | length 4
  Top Layer w0.5: R20.2 R19.1 R18.2
NetU2_11: U2.11 U5.11 | length 19.1
  Top Layer w0.3: v1(23.8,26.25) 23.8,25.83 26.78,22.85 29.067,22.85 32.157,19.76 U5.11
  Top Layer w0.5: v1(22.61,30.22) U2.11
  Bottom Layer w0.3: v1(22.61,30.22) 23.8,29.03 v1(23.8,26.25)
NetU2_12: U2.12 U5.10 | length 19
  Top Layer w0.3: v1(24.9,26.25) 24.9,25.514 26.864,23.55 29.15,23.55 31.67,21.03 U5.10
  Top Layer w0.5: U2.12 v1(26.24,31.49)
  Bottom Layer w0.3: v1(24.9,26.25) 24.9,30.15 v1(26.24,31.49)
NetU3_1: U3.1 U3.8 | length 5.8
  Top Layer w0.3: U3.1 U3.8
NetU3_4: U3.4 U4.1 | length 14
  Top Layer w0.3: v1(19.775,11.325) U3.4 ; v1(21.75,21.15) U4.1
  Bottom Layer w0.3: v1(19.775,11.325) 19.775,20.15 20.775,21.15 v1(21.75,21.15)
NetU3_5: U3.5 U4.3 | length 18.1
  Top Layer w0.3: v1(20.625,10.275) 24.025,10.275 25.075,11.325 U3.5 ; v1(21.75,19.25) U4.3
  Bottom Layer w0.3: v1(20.625,10.275) 20.625,18.925 20.95,19.25 v1(21.75,19.25)
VCC: C13.2 J11.2 L1.1 R15.2 R21.2 | length 112.4
  Top Layer w0.5: R15.2 v1(27.175,27.325) ; R21.2 C13.2 63.963,17.662 v1(66.85,14.775) 78.638,14.775 80.05,16.187 80.05,21.525 v1(81.425,22.9) ; L1.1 v1(84.167,31.325)
  Bottom Layer w0.5: v1(27.175,27.325) 30.683,27.325 32.836,25.172 32.836,7.754 J11.2 33.54,5.822 37.149,2.213 62.413,2.213 66.85,6.65 v1(66.85,14.775) ; v1(81.425,22.9) 81.425,26.65 84.167,29.392 v1(84.167,31.325)
pads on no net: U1.9 U2.13 U4.4 U5.15 U5.32 U6.4

## Polygon pours and split planes (outlines as drawn)
VCC on Top Layer "VCC_L01_P008" (solid, remove dead copper, pour order 8): 81.378,39.475 ccw(c81.378,38.576) 80.479,38.576 80.479,29.129 ccw(c81.05,29.129) 81.05,28.558 89.108,28.558 ccw(c89.108,28.95) 89.5,28.95 89.5,33 ccw(c89,33) 89,33.5 84.5,33.5 cw(c84.5,34.5) 83.5,34.5 83.5,38.479 ccw(c82.504,38.479) 82.504,39.475
GND on Top Layer "GND_L01_P006" (solid, remove dead copper, pour order 6): 62.988,39.5 cw(c62.988,38.846) 63.642,38.845 63.642,28.876 ccw(c64.319,28.876) 64.319,28.2 88,28.2 cw(c87.994,26.706) 89.488,26.7 89.488,7.208 cw(c88.774,7.208) 88.774,6.494 86.865,6.494 ccw(c86.865,3.129) 83.5,3.129 83.5,1.457 cw(c82.543,1.457) 82.543,0.5 7.084,0.5 cw(c7.084,1.084) 6.5,1.084 6.5,2.821 ccw(c2.831,2.821) 2.831,6.49 1.5,6.49 cw(c1.5,7.49) 0.5,7.49 0.5,32.774 cw(c1.226,32.774) 1.226,33.5 3,33.5 ccw(c3,36.998) 6.498,36.998 6.498,38 cw(c7.998,38) 7.998,39.5 29.225,39.5 cw(c29.225,38.002) 30.723,38.002 30.723,30.518 ccw(c33.263,30.518) 33.263,27.978 55.96,27.978 ccw(c55.96,30.518) 58.5,30.518 58.5,38.576 cw(c59.424,38.576) 59.424,39.5
+5V on Top Layer "+5V_L01_P002" (solid, remove dead copper, pour order 2): 64.25,38.851 cw(c64.874,38.851) 64.874,39.475 70.92,39.475 cw(c70.92,38.645) 71.75,38.645 71.75,31.625 ccw(c71.95,31.625) 71.95,31.425 72.5,31.425 cw(c72.5,31.225) 72.7,31.225 72.7,31.05 ccw(c72.925,31.05) 72.925,30.825 74.675,30.825 cw(c74.675,30.6) 74.9,30.6 74.9,30 cw(c74.725,30) 74.725,29.825 72.825,29.825 ccw(c72.825,29.7) 72.7,29.7 72.7,29.375 cw(c72.55,29.375) 72.55,29.225 65.425,29.225 cw(c65.425,30.4) 64.25,30.4
NetD1_1 on Top Layer "NETD1_1_L01_P000" (solid, remove dead copper, pour order 0): 73.4,38.9 cw(c74,38.9) 74,39.5 78.782,39.5 cw(c78.782,38.882) 79.4,38.882 79.4,28.82 cw(c79.1,28.82) 79.1,28.52 76.83,28.52 cw(c76.83,28.75) 76.6,28.75 76.6,30.925 ccw(c76.2,30.925) 76.2,31.325 73.775,31.325 cw(c73.775,31.7) 73.4,31.7
GND on Bottom Layer "GND_L02_P004" (solid, remove dead copper, pour order 4): 30.46,39.5 cw(c30.46,38) 31.96,38 31.96,29.53 ccw(c33.501,29.541) 33.512,28 55.96,28 ccw(c55.96,30.54) 58.5,30.54 58.5,38.475 cw(c59.525,38.475) 59.525,39.5 82.625,39.5 cw(c82.625,38.625) 83.5,38.625 83.5,37 ccw(c87,37) 87,33.5 89,33.5 cw(c89,33) 89.5,33 89.5,7.35 cw(c88.65,7.35) 88.65,6.5 86.925,6.5 ccw(c86.925,3.075) 83.5,3.075 83.5,1.5 cw(c82.5,1.5) 82.5,0.5 7.084,0.5 cw(c7.084,1.084) 6.5,1.084 6.5,2.871 ccw(c2.871,2.871) 2.871,6.5 1.476,6.5 cw(c1.476,7.476) 0.5,7.476 0.5,32.695 cw(c1.305,32.695) 1.305,33.5 3.035,33.5 ccw(c3.035,36.963) 6.498,36.963 6.498,38 cw(c7.998,38) 7.998,39.5

## Keep-outs
Keep-Out Layer:
  circle w0.254: c87,3 r2.8
  circle w0.254: c87,37 r2.8
  circle w0.254: c3,37 r2.8
  circle w0.254: c3,3 r2.8

## Other copper
Top Layer:
  text "'.Layer_Name'" at 77.119,-8 h2
Bottom Layer:
  text "'.Layer_Name'" at 88.948,-10 h2

## Silkscreen, mask and mechanical layers (free items; w line width, h text height)
Top Overlay:
  text "3V3" at 57.925,37.37 h1.2
  text "EN" at 57.925,34.83 h1.2
  text "Tx" at 58.663,32.25 h1.2 r90
  text "IO22" at 86.752,30.526 h1 r90
  text "5V" at 3.567,29.93 h1.52
  text "Rx" at 57.925,29.75 h1.2
  text "IO21" at 86.752,27.986 h1 r90
  text "3.3V" at 3.567,27.39 h1.52
  text "IO0" at 58.138,27.225 h1.2
  text "IO36" at 80.497,26 h1.2
  text "IO16" at 86.752,25.446 h1 r90
  text "BATT+" at 3.567,25.2 h1.52
  text "GND" at 58.138,24.825 h1.2
  text "BATT-" at 3.567,23.619 h1.52
  text "IO39" at 80.508,23.46 h1.2
  text "IO4" at 86.752,22.906 h1 r90
  text "IO32" at 80.512,20.92 h1.2
  text "IO2" at 86.752,20.366 h1 r90
  text "IO35" at 80.491,18.38 h1.2
  text "IO17" at 86.752,17.826 h1 r90
  text "GND" at 0.425,17.55 h1.52
  text "IO33" at 80.504,15.84 h1.2
  text "IO8" at 86.752,15.286 h1 r90
  text "IO27" at 80.506,13.3 h1.2
  text "IO7" at 86.752,12.746 h1 r90
  text "IO9" at 81.106,10.76 h1.2
  text "IO6" at 86.752,10.206 h1 r90
  text "IO10" at 80.511,8.22 h1.2
  text "IO11" at 86.752,7.666 h1 r90
Bottom Overlay:
  text "E+" at 9.415,9.275 h1.52 r270
  text "E-" at 11.318,9.275 h1.52 r270
  text "S-" at 13.474,9.269 h1.52 r270
  text "S+" at 15.308,9.269 h1.52 r270
  text "GND" at 43,9.222 h1.52 r270
  text "CS" at 45,9.222 h1.52 r270
  text "DATA" at 47.15,9.222 h1.52 r270
  text "CLK" at 49,9.222 h1.52 r270
  text "5V" at 50.8,9.222 h1.52 r270
  text "BATT+" at 59.175,9.067 h1.52 r270
  text "BATT-" at 61.094,9.067 h1.52 r270
Mechanical 1:
  the board outline again, w0.5
Drill Drawing:
  text ".Legend" at 96.5,1.678 h2

## Dimensions
0,0 to 0,40 on Mechanical 1
0,0 to 90,0 on Mechanical 1
51.2,40 to 33.19,40 on Mechanical 1
51.2,33.66 to 51.2,40 on Mechanical 1
0,0 to 3,3 on Mechanical 1
3,3 to 0,0 on Mechanical 1

## Text inside footprints (layer, text, board x,y; h text height)
U5: Top Overlay "38" at 51.99,32.01 h1.5; Top Overlay "1" at 31.69,32.01 h1.5